# Allegro board pcb_doan2.brd
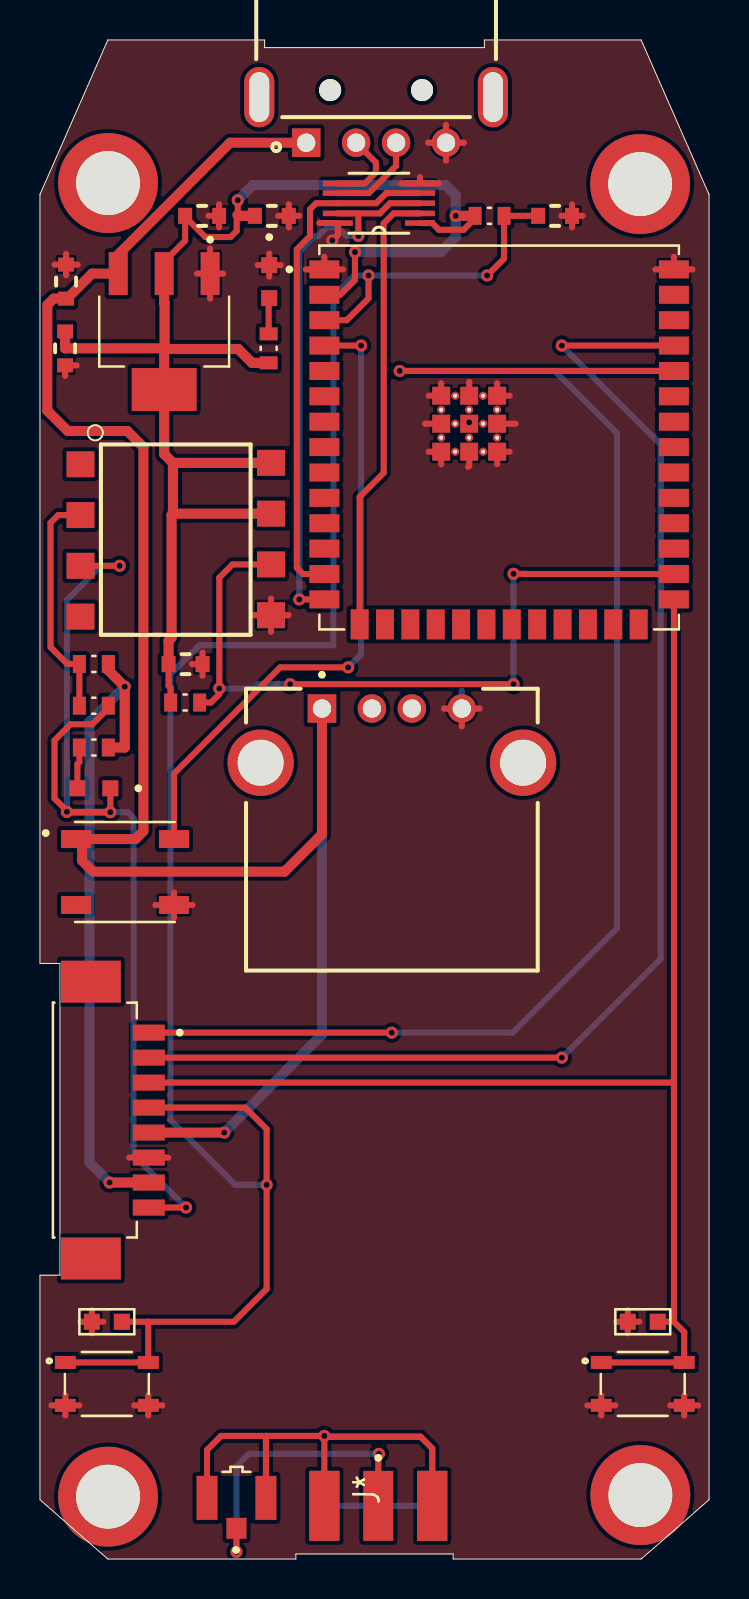
[diagram p0: board, top side]
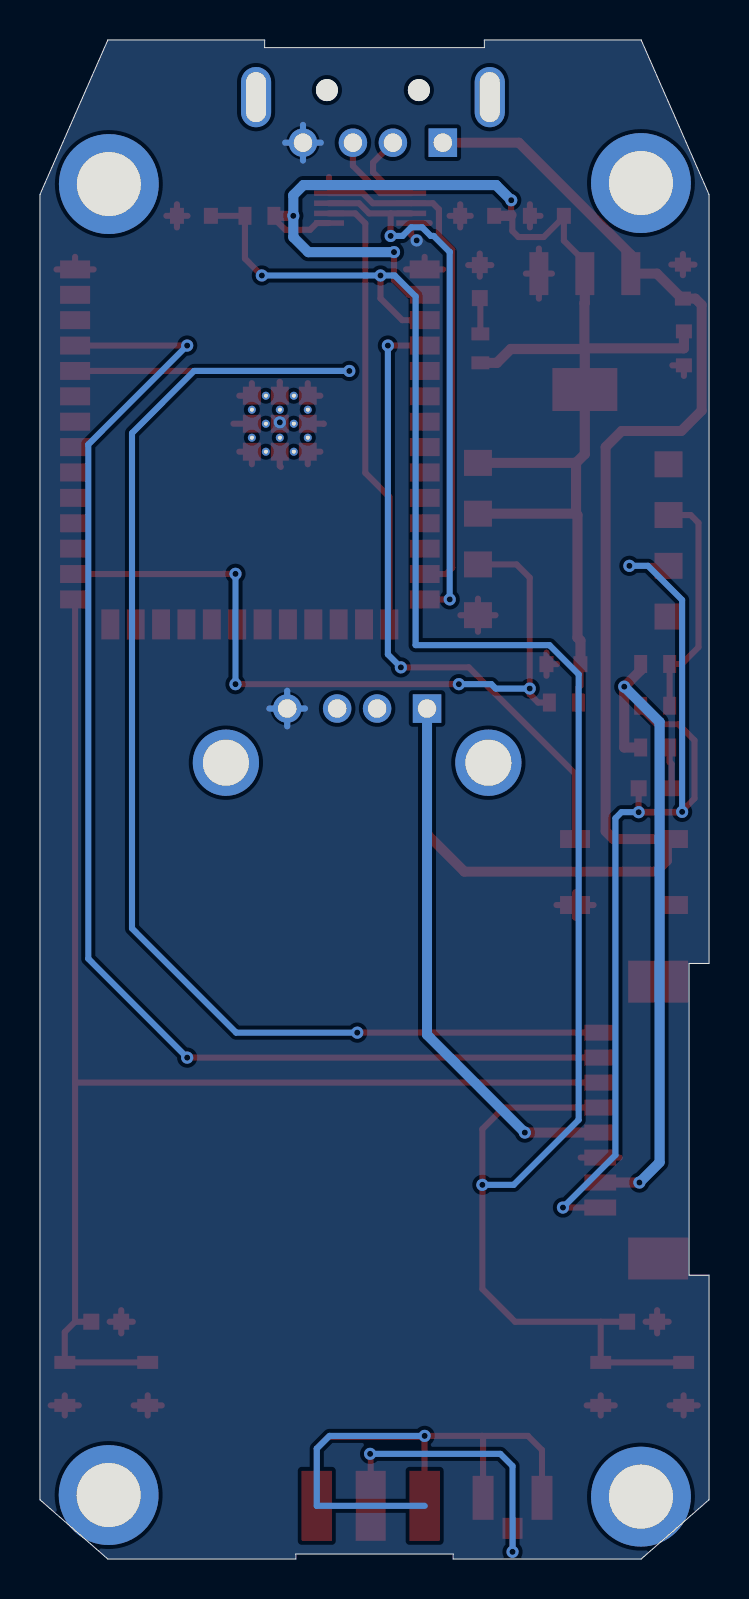
[diagram p1: board, bottom side, seen from below]

Outline 33.5 x 76 mm; copper layers: TOP, BOTTOM. Coordinates in mm from the lower left corner of the outline.
Outline path: 0,68.27 3.4,76 11.25,76 11.25,75.62 22.25,75.62 22.25,76 30.1,76 33.5,68.27 33.5,2.97 30.1,0 20.69,0 20.69,0.25 12.81,0.25 12.81,0 3.4,0 0,2.97 0,14.2 1,14.2 1,29.8 0,29.8 0,68.27

## Design rules (mm)
constraint set DEFAULT: min track width 0.305
net group USB: nets USB_D+ USB_D-
nets with their own width: min track width 0.254; nets 5V

## Placement (name value [footprint] x y rotation side)
C1  1 uF  [WCAP-CSGP_0603_W]  8.12 67.2 180 top
C2  10 uF  [WCAP-CSGP_0603_W]  11.61 67.2 180 top
C3  10 uF  [WCAP-CSGP_0603_W]  7.29 44.77 180 top
C4  104  [CAPC0603X33N]  30.18 11.87 0 top
C5  104  [CAPC0603X33N]  3.35 11.87 0 top
C6  10 uF  [WCAP-CSGP_0603_W]  1.31 63.91 270 top
C7  10 uF  [WCAP-CSGP_0603_W]  1.26 60.57 90 top
C8  1 uF  [WCAP-CSGP_0603_W]  25.79 67.2 0 top
D1  0603  [LED_KP-1608SURCK]  2.7 38.56 180 top
D2  0603  [LED_KP-1608SURCK]  11.48 63.91 270 top
J1  10114830-10108LF  [AMPHENOL_10114830-10108LF]  2.75 21.96 270 top
J2  USB_MALE  [SAMTEC_USB-AM-S-X-X-TH]  16.83 73.14 180 top
J3  USB_FEMALE  [SAMTEC_USB-A-S-X-X-TH]  17.62 39.84 0 top
J4  CON-SMA-EDGE-S  [RFSOLUTIONS_CON-SMA-EDGE-S]  16.94 2.66 90 top
J5  20279-001E-03  [IPEX_20279-001E-03]  9.84 3.06 0 top
J25  Hole_3.5  [SAMTEC_TMS-101-21-G-S]  3.41 68.84 0 top
J26  Hole_3.5  [SAMTEC_TMS-101-21-G-S]  30.05 68.79 0 top
J27  Hole 3.5  [SAMTEC_TMS-101-21-G-S]  3.41 3.12 0 top
J31  Hole_3.5  [SAMTEC_TMS-101-21-G-S]  30.06 3.2 0 top
R1  270  [RESC1508X55N]  2.7 44.78 0 top
R2  270  [RESC1508X55N]  2.7 40.6 0 top
R3  10K  [RESC1508X55N]  2.7 42.69 0 top
R4  10K  [RESC1508X55N]  7.27 42.85 180 top
R7  1K5  [RESC1508X55N]  11.45 60.57 270 top
R8  10K  [RESC1508X55N]  22.51 67.2 0 top
S1  RESET  [SW_SKRPACE010]  3.35 8.76 0 top
S2  BOOT  [SW_SKRPACE010]  30.18 8.76 0 top
U1  ESP32-S3-WROOM-1U-N16  [XCVR_ESP32-S3-WROOM-1U-N16]  22.99 56.11 0 top
U2  OPTO__6N137  [8-SMD]  6.99 50.81 270 top
U4  WS2812B-B  [LED_WS2812B-B]  4.26 34.37 0 top
U5  FSUSB42MUX  [SOP50P490X110-10N]  16.97 67.83 180 top
VR1  LM1117MPX-33NOPB  [VREG_LM1117MPX-33NOPB]  6.22 61.41 270 top

## Library data of the parts
C1-C3 C6-C8 = GRM033C71C104KE14J_0
C4 C5 = GRM033C71C104KE14J
D1 D2 = KP-1608SURCK
J1 = 10114830-10108LF
J2 = USB-AM-S-X-X-TH
J3 = USB-A-S-X-X-TH
J4 = CON-SMA-EDGE-S
J5 = 20279-001E-03
J25-J27 = TMS-101-21-G-S_2
J31 = TMS-101-21-G-S
R1-R4 R7 R8 = 6-1879417-7_0
S1 S2 = SKRPACE010
U1 = ESP32-S3-WROOM-1U-N16
U2 = OPTO_DARLINGTON_6N137
U4 = WS2812B-B
U5 = FSUSB42MUX
VR1 = LM1117MPX-33NOPB

## Footprints (pads in the part's own frame, mm; a bottom-side part is the same pattern mirrored in y, then rotated)
8-SMD
  rect 1.3x1.399 smd: 1(-3.96,-4.96) 2(-1.42,-4.96) 3(1.12,-4.96) 4(3.66,-4.96) 5(3.59,4.58) 6(1.05,4.58) 7(-1.49,4.58) 8(-4.03,4.58)
AMPHENOL_10114830-10108LF
  rect 0.8x1.6 smd: 1(-4.375,2.7) 2(-3.125,2.7) 3(-1.875,2.7) 4(-0.625,2.7) 5(0.625,2.7) 6(1.875,2.7) 7(3.125,2.7) 8(4.375,2.7)
  rect 2.101x3 smd: SH1(-6.925,-0.2) SH2(6.925,-0.2)
CAPC0603X33N
  rect 0.8x0.8 smd: 1(-0.75,0) 2(0.75,0)
IPEX_20279-001E-03
  rect 1.001x1.049 smd: 1(0,-1.525)
  rect 1.049x2.2 smd: 2(1.475,0) 3(-1.475,0)
LED_KP-1608SURCK
  rect 0.8x0.8 smd: 1(0.825,0) 2(-0.825,0)
LED_WS2812B-B
  rect 1.501x0.899 smd: 1(-2.45,1.65) 2(-2.45,-1.65) 3(2.45,-1.65) 4(2.45,1.65)
RESC1508X55N
  rect 0.65x0.899 smd: 1(-0.725,0) 2(0.725,0)
RFSOLUTIONS_CON-SMA-EDGE-S
  rect 3.5x1.501 smd: 1(0,0) G1(0,2.7) G2(0,-2.7) G3(0,2.7) G4(0,-2.7)
SAMTEC_TMS-101-21-G-S
  round 5 hole 3.2: 03(0,0)
SAMTEC_USB-A-S-X-X-TH
  rect 1.427x1.427 hole 0.919: 01(-3.5,2.71)
  round 1.427 hole 0.919: 02(-1,2.71) 03(1,2.71) 04(3.5,2.71)
  round 3.317 hole 2.301: S1(-6.57,0) S2(6.57,0)
SAMTEC_USB-AM-S-X-X-TH
  round 1.1 hole 1.1 unplated: (-2.301,-0.35) (2.301,-0.35)
  rect 1.427x1.427 hole 0.919: 01(3.5,2.281)
  round 1.427 hole 0.919: 02(1.001,2.281) 03(-1.001,2.281) 04(-3.5,2.281)
  oval 1.509x3.015 hole 1.001x2.499: S1(-5.85,0) S2(5.85,0)
SOP50P490X110-10N
  rect 1.499x0.279 smd: 1(-2.057,0.991) 2(-2.057,0.508) 3(-2.057,0) 4(-2.057,-0.508) 5(-2.057,-0.991) 6(2.057,-0.991) 7(2.057,-0.508) 8(2.057,0) 9(2.057,0.508) 10(2.057,0.991)
SW_SKRPACE010
  rect 1.049x0.65 smd: 1(-2.075,1.075) 2(2.075,1.075) 3(-2.075,-1.075) 4(2.075,-1.075)
VREG_LM1117MPX-33NOPB
  rect 2.149x0.95 smd: 1(-2.9,2.3) 2(-2.9,0) 3(-2.9,-2.3)
  rect 2.149x3.251 smd: 4(2.9,0)
WCAP-CSGP_0603_W
  rect 0.701x0.8 smd: 1(-0.85,0) 2(0.85,0)
XCVR_ESP32-S3-WROOM-1U-N16
  rect 1.501x0.899 smd: 1(-8.75,8.41) 2(-8.75,7.14) 3(-8.75,5.87) 4(-8.75,4.6) 5(-8.75,3.33) 6(-8.75,2.06) 7(-8.75,0.79) 8(-8.75,-0.48) 9(-8.75,-1.75) 10(-8.75,-3.02) 11(-8.75,-4.29) 12(-8.75,-5.56) 13(-8.75,-6.83) 14(-8.75,-8.1) 27(8.75,-8.1) 28(8.75,-6.83) 29(8.75,-5.56) 30(8.75,-4.29) 31(8.75,-3.02) 32(8.75,-1.75) 33(8.75,-0.48) 34(8.75,0.79) 35(8.75,2.06) 36(8.75,3.33) 37(8.75,4.6) 38(8.75,5.87) 39(8.75,7.14) 40(8.75,8.41)
  rect 0.899x1.501 smd: 15(-6.985,-9.35) 16(-5.715,-9.35) 17(-4.445,-9.35) 18(-3.175,-9.35) 19(-1.905,-9.35) 20(-0.635,-9.35) 21(0.635,-9.35) 22(1.905,-9.35) 23(3.175,-9.35) 24(4.445,-9.35) 25(5.715,-9.35) 26(6.985,-9.35)
  rect 0.899x0.899 smd: 41_1(-2.9,2.09) 41_2(-1.5,2.09) 41_3(-0.1,2.09) 41_4(-2.9,0.69) 41_5(-1.5,0.69) 41_6(-0.1,0.69) 41_7(-2.9,-0.71) 41_8(-1.5,-0.71) 41_9(-0.1,-0.71)
  round 0.399 hole 0.201: 41_10(-2.2,2.09) 41_11(-0.8,2.09) 41_12(-2.9,1.39) 41_13(-1.5,1.39) 41_14(-0.1,1.39) 41_15(-2.2,0.69) 41_16(-0.8,0.69) 41_17(-2.9,-0.01) 41_18(-1.5,-0.01) 41_19(-0.1,-0.01) 41_20(-2.2,-0.71) 41_21(-0.8,-0.71)

## Nets
3V3: C1.2 C2.2 C3.2 C7.2 R4.2 R7.2 R8.1 U1.2 U2.7 U2.8 U5.1(VCC) VR1.2 VR1.4(VOUT_4)
5V: C6.2 J1.5 J2.01(VCC) J3.01(VCC) U4.1 VR1.3
24V: J1.7 R1.2 R2.2
GND: C1.1 C2.1 C3.1 C4.1 C5.1 C6.1 C7.1 C8.2 D2.2(C) J1.6 J2.04 J3.04 S1.3 S1.4 S2.3 S2.4 U1.1 U1.40 U1.41_1 U1.41_2 U1.41_3 U1.41_4 U1.41_5 U1.41_6 U1.41_7 U1.41_8 U1.41_9 U2.5 U4.3(VSS) U5.5 U5.10 VR1.1
D+: J2.03 U5.7
D-: J2.02 U5.6
ESP_D+: U1.14 U5.3 U5.9
ESP_D-: U1.13 U5.4 U5.8
H_GND: D1.2(C) J1.8 R3.2 U2.3
IO0: C4.2 J1.3 S2.1 S2.2 U1.27
IO_24V: R4.1 U1.28 U2.6(VOUT)
RST_ESP32: C5.2 C8.1 J1.4 R8.2 S1.1 S1.2 U1.3
SEL_USB: U1.15 U5.2
STATUS_ESP: U1.4 U4.4
UART0_ESP_RX: J1.1 U1.36
UART0_ESP_TX: J1.2 U1.37(TXD0)
USB_D+: J3.03
USB_D-: J3.02
N623394: R1.1 R3.1 U2.2
N625779: D2.1 R7.1
N627704: J4.1 J5.1(SIGNAL)
N627760: J4.G1 J4.G2 J4.G3 J4.G4(2__3) J5.2 J5.3
N6234180: D1.1 R2.1

Pads without a net: J1 SH1 SH2; J2 S1 S2; J3 S1 S2; J25 03; J26 03; J27 03; J31 03; U1 5 6 7 8 9 10 11 12 16 17 18 19 20 21 22 23 24 25 26 29 30 31 32 33 34 35 38 39 41_10 41_11 41_12 41_13 41_14 41_15 41_16 41_17 41_18 41_19 41_20 41_21; U2 1 4; U4 2

## Via types
v1: diameter 0.61, hole 0.305, TOP to BOTTOM, 30 vias

## Routing (per net, layer and track width the routed paths; a pad name or vN(x,y) marks a point on that pad's centre or on a via; arc(x,y) is an arc through that point)
3V3: length 78.3
  TOP w0.305: 9.91,67.26 9.97,67.2 ; 9.91,67.26 9.85,67.2 9.85,66.45 9.54,66.14 8.28,66.14 7.27,67.15 ; 9.91,67.26 9.91,67.98 ; 6.22,64.91 7.27,65.96 7.27,67.15 ; C3.2 6.44,43.68 6.54,43.58 R4.2 ; R8.1 21.78,67.08 21.21,66.5 19.97,66.5 19.64,66.84 U5.1 ; 7.27,67.15 C1.2 ; v1(15.77,65.39) 15.77,63.99 15.03,63.25 U1.2
  TOP w0.508: 6.24,60.57 6.24,62.83 6.22,62.86 VR1.2 6.22,64.91 ; 6.24,60.57 1.26,60.57 C7.2 ; 6.24,60.57 6.22,60.55 ; 6.22,60.55 6.23,60.54 9.92,60.54 10.62,59.85 R7.2 ; 6.22,60.55 VR1.4 6.22,55.28 6.66,54.84 ; 9.89,67.24 9.93,67.2 C2.2 ; C3.2 6.44,45.95 6.59,46.1 6.59,52.23 6.66,52.3 ; 6.66,54.84 U2.8 ; 6.66,54.84 6.66,52.3 ; 6.66,52.3 U2.7 ; 9.91,67.98 v1(9.9,67.98) ; v1(20.81,67.2) R8.1
  BOTTOM w0.508: v1(15.77,65.39) 20.06,65.39 20.81,66.14 v1(20.81,67.2) 20.81,68.23 20.31,68.74 10.66,68.74 v1(9.9,67.98)
5V: length 97.9
  TOP w0.5: J1.5 v1(9.22,21.34) ; J2.01 9.52,70.86 3.92,65.26 VR1.3 2.61,64.31 1.36,63.06 C6.2 0.69,63.06 0.37,62.74 0.37,57.46 1.39,56.44 4.37,56.44 5.18,55.63 5.18,36.41 4.79,36.02 2.11,36.02 ; 2.11,36.02 U4.1 ; 2.11,36.02 2.11,34.94 2.66,34.39 12.25,34.39 14.12,36.26 J3.01
  BOTTOM w0.5: v1(9.22,21.34) 14.12,26.23 J3.01
24V: length 33.3
  TOP w0.508: 3.42,44.78 3.42,44.47 v1(4.25,43.65) 4.25,40.6 3.42,40.6 ; J1.7 v1(3.49,18.84)
  BOTTOM w0.508: v1(4.25,43.65) 2.48,41.88 2.48,19.84 v1(3.49,18.84)
GND: length 70.9
  TOP w0.305: VR1.1 9.17,64.31 ; VR1.1 8.52,65.56 ; VR1.1 7.87,64.31 ; VR1.1 8.52,63.06 ; S1.3 1.98,7.69 ; S1.3 1.27,7.18 ; S1.3 0.57,7.69 ; S1.3 1.27,8.19 ; S1.4 5.42,8.19 ; S1.4 5.42,7.18 ; S1.4 4.72,7.69 ; S1.4 6.13,7.69 ; 19.29,56.79 19.3,56.8 U1.41_4 ; 19.46,55.4 U1.41_7 20.09,54.77 ; C8.2 26.64,67.78 ; C8.2 27.17,67.2 ; C8.2 26.64,66.62 ; C8.2 26.11,67.2 ; C2.1 12.46,67.78 ; C2.1 12.99,67.2 ; C2.1 11.93,67.2 ; C2.1 12.46,66.62 ; U2.5 12.45,47.22 ; U2.5 11.57,48.05 ; U2.5 10.69,47.22 ; U2.5 11.57,46.39 ; 10.9,64.74 D2.2 ; D2.2 12.06,64.74 ; D2.2 11.48,64.16 ; D2.2 11.48,65.31 ; 22.89,58.83 U1.41_3 23.52,58.2 ; U4.3 7.64,32.72 ; U4.3 5.78,32.72 ; U4.3 6.71,32.09 ; U4.3 6.71,33.35 ; 6.43,20.09 J1.6 4.47,20.09 ; 21.12,41.66 J3.04 ; J3.04 20.23,42.55 ; J3.04 22.01,42.55 ; U5.5 19.95,68.82 ; U5.5 19.03,69.14 ; U5.5 18.1,68.82 ; 30.81,64.52 U1.40 ; U1.40 32.67,64.52 ; U1.40 31.74,65.15 ; C6.1 1.89,64.76 ; C6.1 1.31,64.23 ; C6.1 0.73,64.76 ; C6.1 1.31,65.29 ; 29.43,11.29 C4.1 ; C4.1 29.43,12.45 ; C4.1 30.01,11.87 ; C4.1 28.85,11.87 ; S2.3 28.81,7.69 ; S2.3 27.4,7.69 ; S2.3 28.1,7.18 ; S2.3 28.1,8.19 ; 7.61,44.77 C3.1 ; C3.1 8.14,44.19 ; C3.1 8.14,45.35 ; 20.33,69.97 J2.04 ; J2.04 20.33,71.75 ; J2.04 21.22,70.86 ; J2.04 19.44,70.86 ; 14.66,65.99 14.91,66.24 U5.10 13.98,66.84 ; 14.66,65.99 14.66,66.06 14.64,66.04 v1(14.64,65.97) 14.66,65.99 ; C5.1 2.6,12.45 ; C5.1 2.02,11.87 ; C5.1 2.6,11.29 ; C5.1 3.18,11.87 ; 13.31,64.52 U1.1 ; U1.1 14.24,65.15 ; U1.1 15.17,64.52 ; 21.5,58.89 21.49,58.88 U1.41_2 ; C1.1 8.97,67.78 ; C1.1 8.97,66.62 ; C1.1 8.44,67.2 ; 21.44,54.64 21.49,54.69 U1.41_8 ; U1.41_5 v1(21.49,56.87) ; 23.52,55.4 U1.41_9 22.89,54.77 ; S2.4 32.96,7.69 ; S2.4 32.25,7.18 ; S2.4 32.25,8.19 ; S2.4 31.55,7.69 ; 1.26,59.19 C7.1 1.84,59.72 ; 20.09,58.83 U1.41_1 19.46,58.2 ; U1.41_6 23.81,56.8
  BOTTOM w0.305: 20.33,69.97 J2.04 ; J2.04 20.33,71.75 ; J2.04 19.44,70.86 ; J2.04 21.22,70.86 ; J3.04 21.12,43.44 ; J3.04 21.12,41.66 ; J3.04 22.01,42.55 ; J3.04 20.23,42.55
D+: length 4.6
  TOP w0.305: U5.7 16.46,68.34 17.83,69.7 J2.03
D-: length 4
  TOP w0.305: J2.02 16.82,69.87 16.82,69.38 16.26,68.82 U5.6
ESP_D+: length 27.7
  TOP w0.305: v1(15.94,66.2) 15.94,67.32 ; 15.94,67.32 17.02,67.32 17.53,67.83 U5.3 ; 15.94,67.32 U5.9 ; U1.14 v1(12.98,48.01)
  BOTTOM w0.305: v1(15.94,66.2) 15.34,66.2 14.91,66.63 14.37,66.63 13.93,66.2 13.79,66.2 12.98,65.39 12.98,65.39 v1(12.98,48.01)
ESP_D-: length 25.6
  TOP w0.305: U1.13 13.17,49.28 12.86,49.59 12.86,65.52 13.52,66.18 13.52,67.53 13.83,67.83 U5.8 16.83,67.83 17.34,68.34 U5.4
H_GND: length 52.6
  TOP w0.305: v1(1.35,37.38) 3.51,37.38 v1(3.52,37.37) 3.52,37.54 ; 3.52,38.56 3.52,37.54 ; 3.52,37.54 3.34,37.35 1.43,37.35 0.73,38.05 0.73,40.96 1.53,41.76 2.62,41.76 3.42,42.57 3.42,42.69 ; J1.8 v1(7.31,17.59) ; U2.3 v1(3.99,49.69)
  BOTTOM w0.305: v1(3.52,37.37) 4.38,37.37 4.69,37.06 4.69,20.21 v1(7.31,17.59) ; v1(3.99,49.69) 3.06,49.69 1.35,47.98 v1(1.35,37.38)
IO0: length 69.6
  TOP w0.305: 31.74,23.84 31.74,11.87 ; 31.74,23.84 5.45,23.84 ; 31.74,23.84 U1.27 ; 31.74,11.87 32.25,11.36 S2.2 S2.1 ; 31.74,11.87 C4.2
IO_24V: length 38.2
  TOP w0.305: v1(23.71,49.29) 24.29,49.29 24.3,49.28 U1.28 ; v1(12.52,43.77) v1(23.71,43.77) ; U2.6 9.64,49.76 8.98,49.1 v1(8.98,43.55) 8.98,43.27 8.56,42.85 R4.1
  BOTTOM w0.305: v1(12.52,43.77) 10.9,43.77 10.68,43.55 v1(8.98,43.55) ; v1(23.71,43.77) v1(23.71,49.29)
RST_ESP32: length 100.1
  TOP w0.305: C8.1 R8.2 23.23,65.06 v1(22.39,64.22) ; U1.3 15.36,61.98 16.45,63.07 v1(16.45,64.22) ; J1.4 10.27,22.59 11.35,21.51 v1(11.35,18.72) 11.35,13.51 9.71,11.87 5.42,11.87 ; C5.2 5.42,11.87 ; 5.42,11.87 S1.2 S1.1
  BOTTOM w0.305: v1(11.35,18.72) 9.78,18.72 6.53,21.97 6.53,44.26 7.99,45.72 14.69,45.72 14.69,63.17 15.73,64.22 v1(16.45,64.22) v1(22.39,64.22)
SEL_USB: length 22.6
  TOP w0.305: U5.2 17.71,67.32 17.21,66.82 17.21,54.34 16,53.14 16,46.76
STATUS_ESP: length 32.4
  TOP w0.305: U4.4 6.71,39.29 12.03,44.61 v1(15.43,44.61) ; U1.4 v1(16.08,60.71)
  BOTTOM w0.305: v1(16.08,60.71) 16.08,45.26 v1(15.43,44.61)
UART0_ESP_RX: length 76.3
  TOP w0.305: 5.45,26.34 v1(17.61,26.34) ; U1.36 v1(18.01,59.44)
  BOTTOM w0.305: v1(17.61,26.34) 23.67,26.34 28.89,31.55 28.89,56.33 25.78,59.44 v1(18.01,59.44)
UART0_ESP_TX: length 66
  TOP w0.305: U1.37 v1(26.13,60.71) ; J1.2 v1(26.13,25.09)
  BOTTOM w0.305: v1(26.13,60.71) 31.08,55.76 31.08,30.04 v1(26.13,25.09)
N623394: length 11.8
  TOP w0.305: R3.1 R1.1 1.37,44.78 0.53,45.62 0.53,51.84 0.92,52.23 U2.2
N625779: length 1.8
  TOP w0.305: D2.1 11.45,63.06 11.45,61.3
N627704: length 15.5
  TOP w0.305: J5.1 v1(9.84,0.36) ; v1(16.97,5.26) 16.94,5.23 J4.1
  BOTTOM w0.305: v1(9.84,0.36) 9.84,4.65 10.45,5.26 16.78,5.26 v1(16.97,5.26)
N627760: length 37.7
  TOP w0.305: 11.37,6.16 9.07,6.16 8.36,5.46 J5.3 ; 11.37,6.16 v1(14.24,6.16) 14.19,6.11 14.19,6.1 ; 11.37,6.16 11.31,6.1 J5.2 ; 14.19,6.1 14.2,6.11 19.07,6.11 19.64,5.54 J4.G2 ; 14.19,6.1 14.24,6.05 J4.G1
  BOTTOM w0.305: v1(14.24,6.16) 19,6.16 19.64,5.52 J4.G2 J4.G1
N6234180: length 2.1
  TOP w0.305: D1.1 1.87,39.77 1.97,39.87 R2.1

## Copper pours and planes (outline as drawn; the poured copper is in the pictures)
GND on TOP, BOTTOM: 3.4,76 11.25,76 11.25,75.61 22.25,75.61 22.25,76 30.1,76.01 33.5,68.27 33.5,2.96 30.1,0 20.68,0 20.68,0.25 12.81,0.24 12.81,-0.01 3.41,-0.03 -0.01,2.97 0.01,14.22 1,14.22 0.99,29.8 0,29.8 0,68.27
